# Altium PCB GDK.PcbDoc
Units mil, origin at the board's own origin, x right, y up, seen from the top; angles counter-clockwise.
Board outline 3145 x 2325 mil, 2 copper layers (Top Layer, Bottom Layer); 13 components, 5 nets, 28 pads, 1569 vias.
Unrouted connection lines stored in the file: 11.
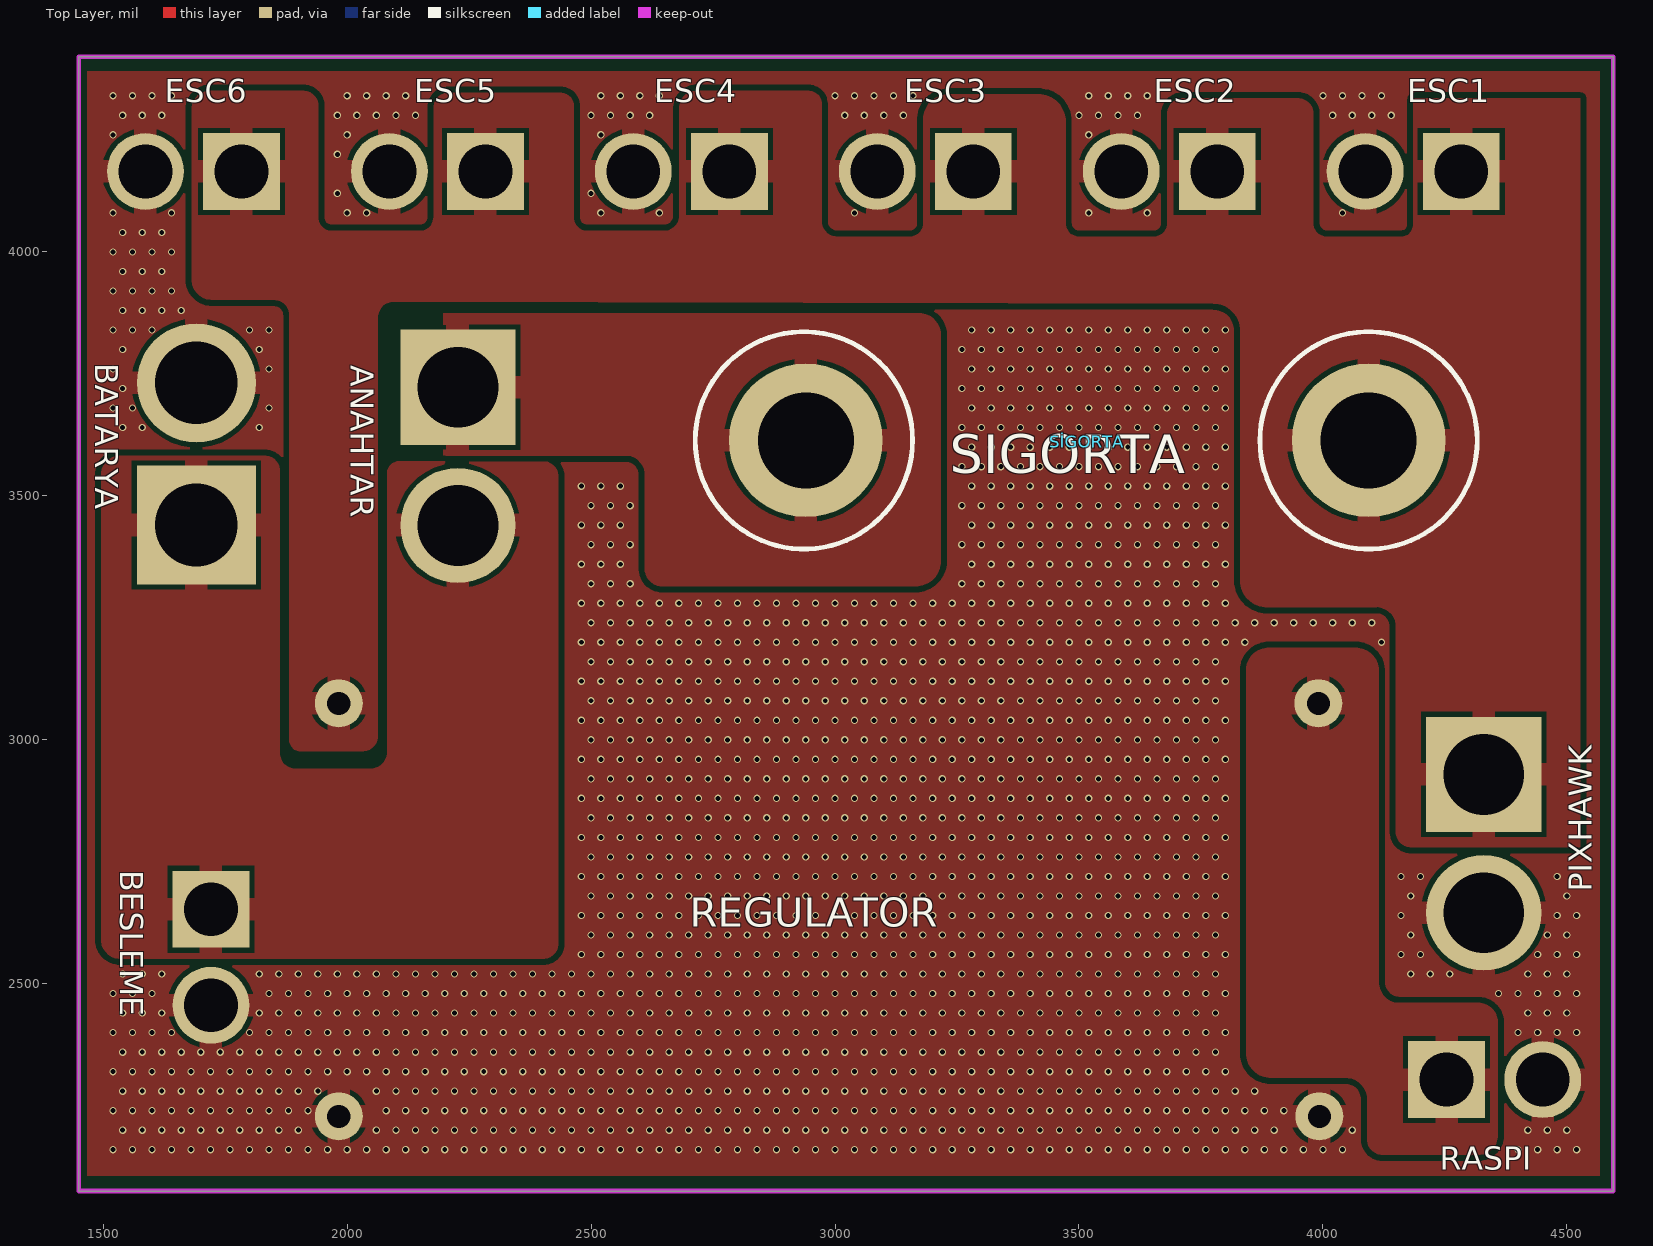
[diagram p0: Top Layer view]
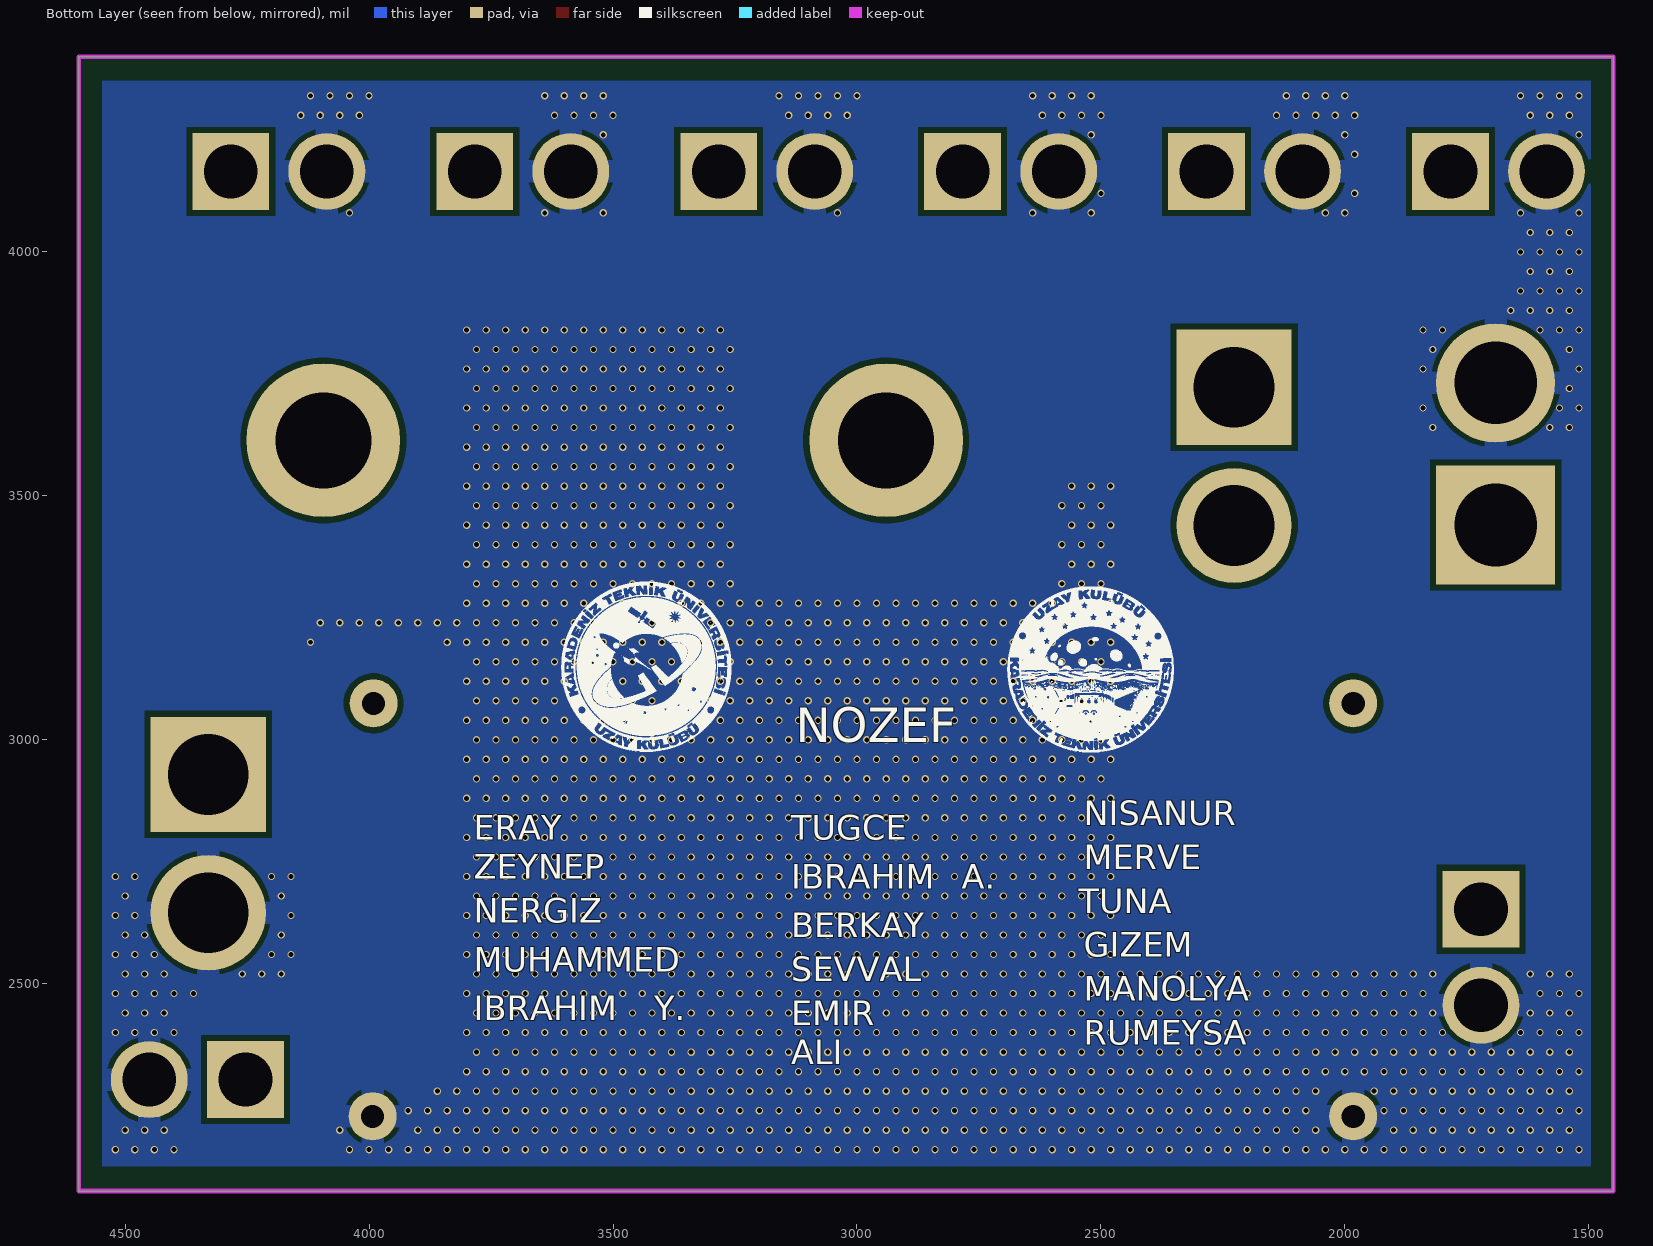
[diagram p1: Bottom Layer view, seen from below]
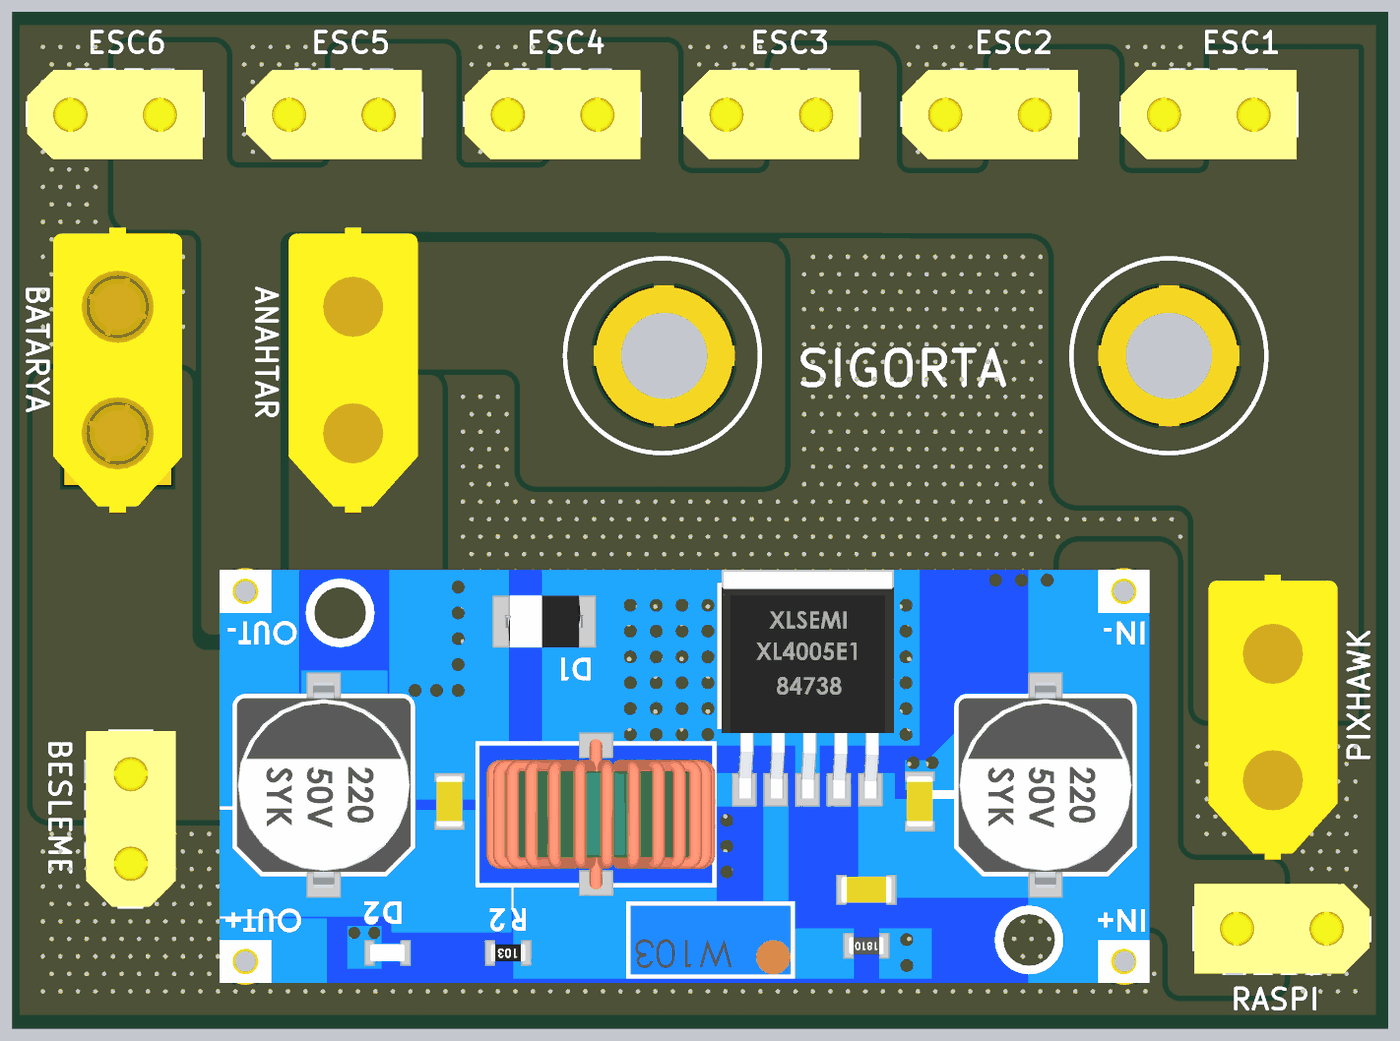
[diagram p2: 3D render of the assembled board from above, using the file's embedded part models]

## Layer stack, top to bottom
Top Solder: solder mask 0.4, Solder Resist, Dk 3.5
Top Layer: signal copper 1.4
Dielectric 1: dielectric 12.6, FR-4, Dk 4.8
Bottom Layer: signal copper 1.4
Bottom Solder: solder mask 0.4, Solder Resist, Dk 3.5

## Board outline
1450,2075 1450,4400 4595,4400 4595,2075

## Design rules (kind name [scope] priority, off if disabled: settings)
Clearance [All] p1: gap=12 ignorepadtopadclearanceinfootprint=FALSE
PolygonConnect [All] p1: connectstyle=Relief reliefconductorwidth=10 reliefentries=4 polygonreliefangle="90 Angle" airgapwidth=10
RoutingVias [All] p1: holewidth=28 width=50 viastyle="Through Hole" minholewidth=28 minwidth=50 maxholewidth=28 maxwidth=50
SolderMaskExpansion [All] p1: expansion=4 istentingtop=FALSE
Width [All] p1: maxlimit=10 minlimit=10 preferedwidth=10
30 further rules are at their usual default settings.

## Classes and differential pairs
component class Sheet1: BATARYA ESC1 ESC2 ESC3 ESC4 ESC5 ESC6 PIXHAWK RASPI REGULATOR SİGORTA

## Components (designator, comment, footprint, x,y, rotation, side; value= is the part's Value field where it differs from the comment)
ANAHTAR "ANAHTAR" "XT60 PİXHAWK" 2227.17,3581.1 r90 top
BATARYA "XT60 BAT" "XT60 BATARYA" 1690.94,3440.35 r270 top
BESLEME "XT30 ESC" "XT30 ESC" 1720.87,2652.76 r90 top
ESC1 "XT30 ESC" "XT30 ESC" 4283.43,4165 r0 top
ESC2 "XT30 ESC" "XT30 ESC" 3783.43,4165 r0 top
ESC3 "XT30 ESC" "XT30 ESC" 3283.43,4165 r0 top
ESC4 "XT30 ESC" "XT30 ESC" 2783.43,4165 r0 top
ESC5 "XT30 ESC" "XT30 ESC" 2283.43,4165 r0 top
ESC6 "XT30 ESC" "XT30 ESC" 1783.43,4165 r0 top
PIXHAWK "XT60-PİX" "XT60 PİXHAWK" 4329.53,2787.4 r90 top (schematic designator PİXHAWK)
RASPI "XT30" "XT30 ESC" 4253.54,2303.54 r180 top (schematic designator GÜÇ)
REGULATOR "REGÜLATÖR" REGÜLATÖR 2987.8,2651.57 r90 top (schematic designator REGÜLATÖR)
SİGORTA "SİGORTA" SİGORTA 4093.7,3613.78 r0 top

## Footprints (in the part's own frame and the unit in brackets; to place one, negate y for a bottom-side part, rotate by r counter-clockwise, add the part's x,y. Pads: shape width x height; smd on the part's side, far side on the other; paste and mask are expansions set on the pad)
REGÜLATÖR [mm]
  round 2.5 hole 1.2: 1(10.75,25.525) 2(-10.75,25.525) 3(10.75,-25.475) 4(-10.75,-25.525)
  body extent -12,-26.97 12.01,27.03, height 14.53
SİGORTA [mm]
  round 8 hole 5: 0(-29.3,0) 1(0,0)
  silkscreen extent -35.06,-5.65 5.66,5.65, body extent -40.06,-9.97 9.79,9.08, height 2.93
"XT30 ESC" [mm]
  round 4 hole 2.8: N(-5,0)
  rect 4x4 hole 2.8: P(0,0)
  body extent -7.7,-2.6 2.7,2.7, height 12.6
"XT60 BATARYA" [mm]
  rect 6.2x6.2 hole 4.3: 1(0,0)
  round 6.2 hole 4.3: 2(-7.4,0)
  body extent -11.85,-3.75 4.7,3.75, height 17
"XT60 PİXHAWK" [mm]
  rect 6x6 hole 4.2: 1(3.6,0)
  round 6 hole 4.2: 2(-3.6,0)
  body extent -8.28,-3.8 8.27,3.7, height 15.7

## Part data
ANAHTAR: library part XT60-PİX
BATARYA: library part "XT60 BATARYA"
PIXHAWK: library part XT60-PİXHAWK

## Via types
v1: diameter 15, hole 10, Top Layer to Bottom Layer, tented both sides, 1569 vias

## Nets (pads, with @x,y where several pads share a name; then routed paths per layer and width w, separated by ;. In a path a pad name is that pad's centre, name@x,y a point inside that pad or via, vN(x,y) a via of type N, cw(c..) or ccw(c..) an arc to the next point about the centre after c; other vN are vias at no path point)
+5: RASPI.P REGULATOR.3
A: ANAHTAR.2 BATARYA.1 BESLEME.P
GND: BATARYA.2 BESLEME.N ESC1.N ESC2.N ESC3.N ESC4.N ESC5.N ESC6.N PIXHAWK.2 RASPI.N REGULATOR.2 REGULATOR.4
  other v1: 1520,2160 1560,2160 1600,2160 1640,2160 1680,2160 1720,2160 1760,2160 1800,2160 1840,2160 1880,2160 1920,2160 1960,2160 2000,2160 2040,2160 2080,2160 2120,2160 2160,2160 2200,2160 2240,2160 2280,2160 2320,2160 2360,2160 2400,2160 2440,2160 2480,2160 2520,2160 2560,2160 2600,2160 2640,2160 2680,2160 2720,2160 2760,2160 2800,2160 2840,2160 2880,2160 2920,2160 2960,2160 3000,2160 3040,2160 3080,2160 3120,2160 3160,2160 3200,2160 3240,2160 3280,2160 3320,2160 3360,2160 3400,2160 3440,2160 3480,2160 3520,2160 3560,2160 3600,2160 3640,2160 3680,2160 3720,2160 3760,2160 3800,2160 3840,2160 3880,2160 3920,2160 3960,2160 4000,2160 4040,2160 4400,2160 4440,2160 4480,2160 4520,2160 1540,2200 1580,2200 1620,2200 1660,2200 1700,2200 1740,2200 1780,2200 1820,2200 1860,2200 1900,2200 2060,2200 2100,2200 2140,2200 2180,2200 2220,2200 2260,2200 2300,2200 2340,2200 2380,2200 2420,2200 2460,2200 2500,2200 2540,2200 2580,2200 2620,2200 2660,2200 2700,2200 2740,2200 2780,2200 2820,2200 2860,2200 2900,2200 2940,2200 2980,2200 3020,2200 3060,2200 3100,2200 3140,2200 3180,2200 3220,2200 3260,2200 3300,2200 3340,2200 3380,2200 3420,2200 3460,2200 3500,2200 3540,2200 3580,2200 3620,2200 3660,2200 3700,2200 3740,2200 3780,2200 3820,2200 3860,2200 3900,2200 4060,2200 4420,2200 4460,2200 4500,2200 1520,2240 1560,2240 1600,2240 1640,2240 1680,2240 1720,2240 1760,2240 1800,2240 1840,2240 1880,2240 1920,2240 2080,2240 2120,2240 2160,2240 2200,2240 2240,2240 2280,2240 2320,2240 2360,2240 2400,2240 2440,2240 2480,2240 2520,2240 2560,2240 2600,2240 2640,2240 2680,2240 2720,2240 2760,2240 2800,2240 2840,2240 2880,2240 2920,2240 2960,2240 3000,2240 3040,2240 3080,2240 3120,2240 3160,2240 3200,2240 3240,2240 3280,2240 3320,2240 3360,2240 3400,2240 3440,2240 3480,2240 3520,2240 3560,2240 3600,2240 3640,2240 3680,2240 3720,2240 3760,2240 3800,2240 3840,2240 3880,2240 3920,2240 1540,2280 1580,2280 1620,2280 1660,2280 1700,2280 1740,2280 1780,2280 1820,2280 1860,2280 1900,2280 1940,2280 2060,2280 2100,2280 2140,2280 2180,2280 2220,2280 2260,2280 2300,2280 2340,2280 2380,2280 2420,2280 2460,2280 2500,2280 2540,2280 2580,2280 2620,2280 2660,2280 2700,2280 2740,2280 2780,2280 2820,2280 2860,2280 2900,2280 2940,2280 2980,2280 3020,2280 3060,2280 3100,2280 3140,2280 3180,2280 3220,2280 3260,2280 3300,2280 3340,2280 3380,2280 3420,2280 3460,2280 3500,2280 3540,2280 3580,2280 3620,2280 3660,2280 3700,2280 3740,2280 3780,2280 3820,2280 3860,2280 1520,2320 1560,2320 1600,2320 1640,2320 1680,2320 1720,2320 1760,2320 1800,2320 1840,2320 1880,2320 1920,2320 1960,2320 2000,2320 2040,2320 2080,2320 2120,2320 2160,2320 2200,2320 2240,2320 2280,2320 2320,2320 2360,2320 2400,2320 2440,2320 2480,2320 2520,2320 2560,2320 2600,2320 2640,2320 2680,2320 2720,2320 2760,2320 2800,2320 2840,2320 2880,2320 2920,2320 2960,2320 3000,2320 3040,2320 3080,2320 3120,2320 3160,2320 3200,2320 3240,2320 3280,2320 3320,2320 3360,2320 3400,2320 3440,2320 3480,2320 3520,2320 3560,2320 3600,2320 3640,2320 3680,2320 3720,2320 3760,2320 3800,2320 1540,2360 1580,2360 1620,2360 1660,2360 1700,2360 1740,2360 1780,2360 1820,2360 1860,2360 1900,2360 1940,2360 1980,2360 2020,2360 2060,2360 2100,2360 2140,2360 2180,2360 2220,2360 2260,2360 2300,2360 2340,2360 2380,2360 2420,2360 2460,2360 2500,2360 2540,2360 2580,2360 2620,2360 2660,2360 2700,2360 2740,2360 2780,2360 2820,2360 2860,2360 2900,2360 2940,2360 2980,2360 3020,2360 3060,2360 3100,2360 3140,2360 3180,2360 3220,2360 3260,2360 3300,2360 3340,2360 3380,2360 3420,2360 3460,2360 3500,2360 3540,2360 3580,2360 3620,2360 3660,2360 3700,2360 3740,2360 3780,2360 1520,2400 1560,2400 1600,2400 1640,2400 1800,2400 1840,2400 1880,2400 1920,2400 1960,2400 2000,2400 2040,2400 2080,2400 2120,2400 2160,2400 2200,2400 2240,2400 2280,2400 2320,2400 2360,2400 2400,2400 2440,2400 2480,2400 2520,2400 2560,2400 2600,2400 2640,2400 2680,2400 2720,2400 2760,2400 2800,2400 2840,2400 2880,2400 2920,2400 2960,2400 3000,2400 3040,2400 3080,2400 3120,2400 3160,2400 3200,2400 3240,2400 3280,2400 3320,2400 3360,2400 3400,2400 3440,2400 3480,2400 3520,2400 3560,2400 3600,2400 3640,2400 3680,2400 3720,2400 3760,2400 3800,2400 4400,2400 4440,2400 4480,2400 4520,2400 1540,2440 1580,2440 1620,2440 1820,2440 1860,2440 1900,2440 1940,2440 1980,2440 2020,2440 2060,2440 2100,2440 2140,2440 2180,2440 2220,2440 2260,2440 2300,2440 2340,2440 2380,2440 2420,2440 2460,2440 2500,2440 2540,2440 2580,2440 2620,2440 2660,2440 2700,2440 2740,2440 2780,2440 2820,2440 2860,2440 2900,2440 2940,2440 2980,2440 3020,2440 3060,2440 3100,2440 3140,2440 3180,2440 3220,2440 3260,2440 3300,2440 3340,2440 3380,2440 3420,2440 3460,2440 3500,2440 3540,2440 3580,2440 3620,2440 3660,2440 3700,2440 3740,2440 3780,2440 4420,2440 4460,2440 4500,2440 1520,2480 1560,2480 1600,2480 1840,2480 1880,2480 1920,2480 1960,2480 2000,2480 2040,2480 2080,2480 2120,2480 2160,2480 2200,2480 2240,2480 2280,2480 2320,2480 2360,2480 2400,2480 2440,2480 2480,2480 2520,2480 2560,2480 2600,2480 2640,2480 2680,2480 2720,2480 2760,2480 2800,2480 2840,2480 2880,2480 2920,2480 2960,2480 3000,2480 3040,2480 3080,2480 3120,2480 3160,2480 3200,2480 3240,2480 3280,2480 3320,2480 3360,2480 3400,2480 3440,2480 3480,2480 3520,2480 3560,2480 3600,2480 3640,2480 3680,2480 3720,2480 3760,2480 3800,2480 4360,2480 4400,2480 4440,2480 4480,2480 4520,2480 1540,2520 1580,2520 1620,2520 1820,2520 1860,2520 1900,2520 1940,2520 1980,2520 2020,2520 2060,2520 2100,2520 2140,2520 2180,2520 2220,2520 2260,2520 2300,2520 2340,2520 2380,2520 2420,2520 2460,2520 2500,2520 2540,2520 2580,2520 2620,2520 2660,2520 2700,2520 2740,2520 2780,2520 2820,2520 2860,2520 2900,2520 2940,2520 2980,2520 3020,2520 3060,2520 3100,2520 3140,2520 3180,2520 3220,2520 3260,2520 3300,2520 3340,2520 3380,2520 3420,2520 3460,2520 3500,2520 3540,2520 3580,2520 3620,2520 3660,2520 3700,2520 3740,2520 3780,2520 4180,2520 4220,2520 4260,2520 4420,2520 4460,2520 4500,2520 2480,2560 2520,2560 2560,2560 2600,2560 2640,2560 2680,2560 2720,2560 2760,2560 2800,2560 2840,2560 2880,2560 2920,2560 2960,2560 3000,2560 3040,2560 3080,2560 3120,2560 3160,2560 3200,2560 3240,2560 3280,2560 3320,2560 3360,2560 3400,2560 3440,2560 3480,2560 3520,2560 3560,2560 3600,2560 3640,2560 3680,2560 3720,2560 3760,2560 3800,2560 4160,2560 4200,2560 4440,2560 4480,2560 4520,2560 2500,2600 2540,2600 2580,2600 2620,2600 2660,2600 2700,2600 2740,2600 2780,2600 2820,2600 2860,2600 2900,2600 2940,2600 2980,2600 3020,2600 3060,2600 3100,2600 3140,2600 3180,2600 3220,2600 3260,2600 3300,2600 3340,2600 3380,2600 3420,2600 3460,2600 3500,2600 3540,2600 3580,2600 3620,2600 3660,2600 3700,2600 3740,2600 3780,2600 4180,2600 4460,2600 4500,2600 2480,2640 2520,2640 2560,2640 2600,2640 2640,2640 2680,2640 2720,2640 2760,2640 2800,2640 2840,2640 2880,2640 2920,2640 2960,2640 3000,2640 3040,2640 3080,2640 3120,2640 3160,2640 3200,2640 3240,2640 3280,2640 3320,2640 3360,2640 3400,2640 3440,2640 3480,2640 3520,2640 3560,2640 3600,2640 3640,2640 3680,2640 3720,2640 3760,2640 3800,2640 4160,2640 4480,2640 4520,2640 2500,2680 2540,2680 2580,2680 2620,2680 2660,2680 2700,2680 2740,2680 2780,2680 2820,2680 2860,2680 2900,2680 2940,2680 2980,2680 3020,2680 3060,2680 3100,2680 3140,2680 3180,2680 3220,2680 3260,2680 3300,2680 3340,2680 3380,2680 3420,2680 3460,2680 3500,2680 3540,2680 3580,2680 3620,2680 3660,2680 3700,2680 3740,2680 3780,2680 4180,2680 4500,2680 2480,2720 2520,2720 2560,2720 2600,2720 2640,2720 2680,2720 2720,2720 2760,2720 2800,2720 2840,2720 2880,2720 2920,2720 2960,2720 3000,2720 3040,2720 3080,2720 3120,2720 3160,2720 3200,2720 3240,2720 3280,2720 3320,2720 3360,2720 3400,2720 3440,2720 3480,2720 3520,2720 3560,2720 3600,2720 3640,2720 3680,2720 3720,2720 3760,2720 3800,2720 4160,2720 4200,2720 4480,2720 4520,2720 2500,2760 2540,2760 2580,2760 2620,2760 2660,2760 2700,2760 2740,2760 2780,2760 2820,2760 2860,2760 2900,2760 2940,2760 2980,2760 3020,2760 3060,2760 3100,2760 3140,2760 3180,2760 3220,2760 3260,2760 3300,2760 3340,2760 3380,2760 3420,2760 3460,2760 3500,2760 3540,2760 3580,2760 3620,2760 3660,2760 3700,2760 3740,2760 3780,2760 2480,2800 2520,2800 2560,2800 2600,2800 2640,2800 2680,2800 2720,2800 2760,2800 2800,2800 2840,2800 2880,2800 2920,2800 2960,2800 3000,2800 3040,2800 3080,2800 3120,2800 3160,2800 3200,2800 3240,2800 3280,2800 3320,2800 3360,2800 3400,2800 3440,2800 3480,2800 3520,2800 3560,2800 3600,2800 3640,2800 3680,2800 3720,2800 3760,2800 3800,2800 2500,2840 2540,2840 2580,2840 2620,2840 2660,2840 2700,2840 2740,2840 2780,2840 2820,2840 2860,2840 2900,2840 2940,2840 2980,2840 3020,2840 3060,2840 3100,2840 3140,2840 3180,2840 3220,2840 3260,2840 3300,2840 3340,2840 3380,2840 3420,2840 3460,2840 3500,2840 3540,2840 3580,2840 3620,2840 3660,2840 3700,2840 3740,2840 3780,2840 2480,2880 2520,2880 2560,2880 2600,2880 2640,2880 2680,2880 2720,2880 2760,2880 2800,2880 2840,2880 2880,2880 2920,2880 2960,2880 3000,2880 3040,2880 3080,2880 3120,2880 3160,2880 3200,2880 3240,2880 3280,2880 3320,2880 3360,2880 3400,2880 3440,2880 3480,2880 3520,2880 3560,2880 3600,2880 3640,2880 3680,2880 3720,2880 3760,2880 3800,2880 2500,2920 2540,2920 2580,2920 2620,2920 2660,2920 2700,2920 2740,2920 2780,2920 2820,2920 2860,2920 2900,2920 2940,2920 2980,2920 3020,2920 3060,2920 3100,2920 3140,2920 3180,2920 3220,2920 3260,2920 3300,2920 3340,2920 3380,2920 3420,2920 3460,2920 3500,2920 3540,2920 3580,2920 3620,2920 3660,2920 3700,2920 3740,2920 3780,2920 2480,2960 2520,2960 2560,2960 2600,2960 2640,2960 2680,2960 2720,2960 2760,2960 2800,2960 2840,2960 2880,2960 2920,2960 2960,2960 3000,2960 3040,2960 3080,2960 3120,2960 3160,2960 3200,2960 3240,2960 3280,2960 3320,2960 3360,2960 3400,2960 3440,2960 3480,2960 3520,2960 3560,2960 3600,2960 3640,2960 3680,2960 3720,2960 3760,2960 3800,2960 2500,3000 2540,3000 2580,3000 2620,3000 2660,3000 2700,3000 2740,3000 2780,3000 2820,3000 2860,3000 2900,3000 2940,3000 2980,3000 3020,3000 3060,3000 3100,3000 3140,3000 3180,3000 3220,3000 3260,3000 3300,3000 3340,3000 3380,3000 3420,3000 3460,3000 3500,3000 3540,3000 3580,3000 3620,3000 3660,3000 3700,3000 3740,3000 3780,3000 2480,3040 2520,3040 2560,3040 2600,3040 2640,3040 2680,3040 2720,3040 2760,3040 2800,3040 2840,3040 2880,3040 2920,3040 2960,3040 3000,3040 3040,3040 3080,3040 3120,3040 3160,3040 3200,3040 3240,3040 3280,3040 3320,3040 3360,3040 3400,3040 3440,3040 3480,3040 3520,3040 3560,3040 3600,3040 3640,3040 3680,3040 3720,3040 3760,3040 3800,3040 2500,3080 2540,3080 2580,3080 2620,3080 2660,3080 2700,3080 2740,3080 2780,3080 2820,3080 2860,3080 2900,3080 2940,3080 2980,3080 3020,3080 3060,3080 3100,3080 3140,3080 3180,3080 3220,3080 3260,3080 3300,3080 3340,3080 3380,3080 3420,3080 3460,3080 3500,3080 3540,3080 3580,3080 3620,3080 3660,3080 3700,3080 3740,3080 3780,3080 2480,3120 2520,3120 2560,3120 2600,3120 2640,3120 2680,3120 2720,3120 2760,3120 2800,3120 2840,3120 2880,3120 2920,3120 2960,3120 3000,3120 3040,3120 3080,3120 3120,3120 3160,3120 3200,3120 3240,3120 3280,3120 3320,3120 3360,3120 3400,3120 3440,3120 3480,3120 3520,3120 3560,3120 3600,3120 3640,3120 3680,3120 3720,3120 3760,3120 3800,3120 2500,3160 2540,3160 2580,3160 2620,3160 2660,3160 2700,3160 2740,3160 2780,3160 2820,3160 2860,3160 2900,3160 2940,3160 2980,3160 3020,3160 3060,3160 3100,3160 3140,3160 3180,3160 3220,3160 3260,3160 3300,3160 3340,3160 3380,3160 3420,3160 3460,3160 3500,3160 3540,3160 3580,3160 3620,3160 3660,3160 3700,3160 3740,3160 3780,3160 2480,3200 2520,3200 2560,3200 2600,3200 2640,3200 2680,3200 2720,3200 2760,3200 2800,3200 2840,3200 2880,3200 2920,3200 2960,3200 3000,3200 3040,3200 3080,3200 3120,3200 3160,3200 3200,3200 3240,3200 3280,3200 3320,3200 3360,3200 3400,3200 3440,3200 3480,3200 3520,3200 3560,3200 3600,3200 3640,3200 3680,3200 3720,3200 3760,3200 3800,3200 3840,3200 4120,3200 2500,3240 2540,3240 2580,3240 2620,3240 2660,3240 2700,3240 2740,3240 2780,3240 2820,3240 2860,3240 2900,3240 2940,3240 2980,3240 3020,3240 3060,3240 3100,3240 3140,3240 3180,3240 3220,3240 3260,3240 3300,3240 3340,3240 3380,3240 3420,3240 3460,3240 3500,3240 3540,3240 3580,3240 3620,3240 3660,3240 3700,3240 3740,3240 3780,3240 3820,3240 3860,3240 3900,3240 3940,3240 3980,3240 4020,3240 4060,3240 4100,3240 2480,3280 2520,3280 2560,3280 2600,3280 2640,3280 2680,3280 2720,3280 2760,3280 2800,3280 2840,3280 2880,3280 2920,3280 2960,3280 3000,3280 3040,3280 3080,3280 3120,3280 3160,3280 3200,3280 3240,3280 3280,3280 3320,3280 3360,3280 3400,3280 3440,3280 3480,3280 3520,3280 3560,3280 3600,3280 3640,3280 3680,3280 3720,3280 3760,3280 3800,3280 2500,3320 2540,3320 2580,3320 3260,3320 3300,3320 3340,3320 3380,3320 3420,3320 3460,3320 3500,3320 3540,3320 3580,3320 3620,3320 3660,3320 3700,3320 3740,3320 3780,3320 2480,3360 2520,3360 2560,3360 3280,3360 3320,3360 3360,3360 3400,3360 3440,3360 3480,3360 3520,3360 3560,3360 3600,3360 3640,3360 3680,3360 3720,3360 3760,3360 3800,3360 2500,3400 2540,3400 2580,3400 3260,3400 3300,3400 3340,3400 3380,3400 3420,3400 3460,3400 3500,3400 3540,3400 3580,3400 3620,3400 3660,3400 3700,3400 3740,3400 3780,3400 2480,3440 2520,3440 2560,3440 3280,3440 3320,3440 3360,3440 3400,3440 3440,3440 3480,3440 3520,3440 3560,3440 3600,3440 3640,3440 3680,3440 3720,3440 3760,3440 3800,3440 2500,3480 2540,3480 2580,3480 3260,3480 3300,3480 3340,3480 3380,3480 3420,3480 3460,3480 3500,3480 3540,3480 3580,3480 3620,3480 3660,3480 3700,3480 3740,3480 3780,3480 2480,3520 2520,3520 2560,3520 3280,3520 3320,3520 3360,3520 3400,3520 3440,3520 3480,3520 3520,3520 3560,3520 3600,3520 3640,3520 3680,3520 3720,3520 3760,3520 3800,3520 3260,3560 3300,3560 3340,3560 3380,3560 3420,3560 3460,3560 3500,3560 3540,3560 3580,3560 3620,3560 3660,3560 3700,3560 3740,3560 3780,3560 3280,3600 3320,3600 3360,3600 3400,3600 3440,3600 3480,3600 3520,3600 3560,3600 3600,3600 3640,3600 3680,3600 3720,3600 3760,3600 3800,3600 1540,3640 1580,3640 1820,3640 3260,3640 3300,3640 3340,3640 3380,3640 3420,3640 3460,3640 3500,3640 3540,3640 3580,3640 3620,3640 3660,3640 3700,3640 3740,3640 3780,3640 1520,3680 1560,3680 1840,3680 3280,3680 3320,3680 3360,3680 3400,3680 3440,3680 3480,3680 3520,3680 3560,3680 3600,3680 3640,3680 3680,3680 3720,3680 3760,3680 3800,3680 1540,3720 3260,3720 3300,3720 3340,3720 3380,3720 3420,3720 3460,3720 3500,3720 3540,3720 3580,3720 3620,3720 3660,3720 3700,3720 3740,3720 3780,3720 1520,3760 1840,3760 3280,3760 3320,3760 3360,3760 3400,3760 3440,3760 3480,3760 3520,3760 3560,3760 3600,3760 3640,3760 3680,3760 3720,3760 3760,3760 3800,3760 1540,3800 1820,3800 3260,3800 3300,3800 3340,3800 3380,3800 3420,3800 3460,3800 3500,3800 3540,3800 3580,3800 3620,3800 3660,3800 3700,3800 3740,3800 3780,3800 1520,3840 1560,3840 1600,3840 1800,3840 1840,3840 3280,3840 3320,3840 3360,3840 3400,3840 3440,3840 3480,3840 3520,3840 3560,3840 3600,3840 3640,3840 3680,3840 3720,3840 3760,3840 3800,3840 1540,3880 1580,3880 1620,3880 1660,3880 1520,3920 1560,3920 1600,3920 1640,3920 1540,3960 1580,3960 1620,3960 1520,4000 1560,4000 1600,4000 1640,4000 1540,4040 1580,4040 1620,4040 1520,4080 1640,4080 2000,4080 2040,4080 2520,4080 2640,4080 3040,4080 3520,4080 3640,4080 4040,4080 1980,4120 2500,4120 1980,4200 1520,4240 2000,4240 2520,4240 3520,4240 1540,4280 1580,4280 1620,4280 1980,4280 2020,4280 2060,4280 2100,4280 2140,4280 2500,4280 2540,4280 2580,4280 2620,4280 3020,4280 3060,4280 3100,4280 3140,4280 3500,4280 3540,4280 3580,4280 3620,4280 4020,4280 4060,4280 4100,4280 4140,4280 1520,4320 1560,4320 1600,4320 1640,4320 2000,4320 2040,4320 2080,4320 2120,4320 2520,4320 2560,4320 2600,4320 2640,4320 3000,4320 3040,4320 3080,4320 3120,4320 3160,4320 3520,4320 3560,4320 3600,4320 3640,4320 4000,4320 4040,4320 4080,4320 4120,4320
NetANAHTAR_1: ANAHTAR.1 SİGORTA.0
VCC: ESC1.P ESC2.P ESC3.P ESC4.P ESC5.P ESC6.P PIXHAWK.1 REGULATOR.1 SİGORTA.1

## Polygon pours and split planes (outlines as drawn)
+5 on Top Layer "+5_L01_P002" (solid, pour order 2): 3889.76,3188.97 4066.93,3188.98 cw(c4066.93,3141.73) 4114.17,3141.73 4114.17,2503.94 ccw(c4157.48,2503.94) 4157.48,2460.63 4318.9,2460.63 cw(c4318.9,2421.26) 4358.27,2421.26 4358.27,2188.98 cw(c4318.9,2188.98) 4318.9,2149.61 4122.05,2149.61 cw(c4122.05,2181.1) 4090.55,2181.1 4090.55,2263.78 ccw(c4047.24,2263.78) 4047.24,2307.09 3893.7,2307.09 cw(c3893.7,2358.27) 3842.52,2358.27 3842.52,3141.73 cw(c3889.76,3141.73)
NetANAHTAR_1 on Top Layer "NETANAHTAR_1_L01_P001" (solid, pour order 1): 2196.85,3582.68 2570.87,3582.68 cw(c2570.87,3543.31) 2610.24,3543.31 2610.24,3350.39 ccw(c2645.67,3350.39) 2645.67,3314.96 3165.35,3314.96 ccw(c3165.35,3366.14) 3216.54,3366.14 3216.54,3830.71 ccw(c3173.23,3830.71) 3173.23,3874.02 2196.85,3874.02
VCC on Top Layer "VCC_L01_P000" (solid, pour order 0): 2031.49,2976.38 1905.51,2976.38 cw(c1905.51,3000) 1881.89,3000 1881.89,3870.08 ccw(c1850.4,3870.08) 1850.39,3901.57 1724.41,3901.57 cw(c1724.41,3944.88) 1681.1,3944.88 1681.1,4291.34 cw(c1720.47,4291.34) 1720.47,4330.71 1909.45,4330.71 cw(c1909.46,4299.23) 1940.94,4299.21 1940.94,4070.87 ccw(c1968.5,4070.86) 1968.5,4043.31 2149.61,4043.31 ccw(c2149.61,4070.86) 2177.17,4070.87 2177.17,4295.28 cw(c2208.66,4295.28) 2208.66,4326.77 2437.01,4326.77 cw(c2437.02,4299.23) 2464.57,4299.21 2464.57,4070.87 ccw(c2492.12,4070.86) 2492.13,4043.31 2649.61,4043.31 ccw(c2649.61,4074.8) 2681.1,4074.8 2681.1,4295.28 cw(c2716.53,4295.28) 2716.54,4330.71 2944.88,4330.71 cw(c2944.88,4303.15) 2972.44,4303.15 2972.44,4062.99 ccw(c3003.93,4062.99) 3003.93,4031.5 3153.54,4031.5 ccw(c3153.54,4059.05) 3181.1,4059.06 3181.1,4271.65 cw(c3232.28,4271.65) 3232.28,4322.83 3417.33,4322.83 cw(c3417.35,4267.74) 3472.44,4267.72 3472.44,4059.06 ccw(c3499.99,4059.05) 3500,4031.5 3653.54,4031.5 ccw(c3653.54,4059.05) 3681.1,4059.06 3681.1,4283.46 cw(c3712.6,4283.46) 3712.6,4314.96 3948.82,4314.96 cw(c3948.83,4283.48) 3980.31,4283.46 3980.31,4059.06 ccw(c4007.87,4059.05) 4007.87,4031.5 4161.42,4031.5 ccw(c4161.42,4055.12) 4185.04,4055.12 4185.04,4311.02 cw(c4188.98,4311.02) 4188.98,4314.96 4527.56,4314.96 4527.56,2779.53 4181.1,2779.53 cw(c4181.1,2811.02) 4149.61,2811.02 4149.61,3232.28 ccw(c4110.25,3232.29) 4110.24,3271.65 3885.83,3271.65 cw(c3885.82,3326.77) 3830.71,3326.77 3830.71,3838.55 ccw(c3775.38,3838.56) 3775.5,3893.88 2094.44,3897.54 ccw(c2094.36,3866.17) 2062.99,3866.17 2062.99,3007.87 cw(c2031.5,3007.87)
GND on Top Layer "GND_L01_P007" (solid, remove dead copper, pour order 7): 1460.63,4370.08 4566.93,4370.08 4566.93,2106.3 1460.63,2106.3
A on Top Layer "A_L01_P003" (solid, pour order 3): 1496.06,3543.31 1496.06,2590.55 ccw(c1535.43,2590.55) 1535.43,2551.18 2401.57,2551.18 ccw(c2401.57,2582.68) 2433.07,2582.68 2433.07,3539.37 ccw(c2401.58,3539.37) 2401.57,3570.87 2106.3,3570.87 ccw(c2106.3,3547.24) 2082.68,3547.24 2082.68,2976.38 cw(c2047.25,2976.38) 2047.24,2940.94 1893.7,2940.94 cw(c1893.7,2972.44) 1862.2,2972.44 1862.2,3551.18 ccw(c1830.71,3551.18) 1830.71,3582.68 1535.43,3582.68 ccw(c1535.43,3543.31)
GND on Bottom Layer "GND_L02_P004" (solid, pour order 4): 1496.06,4350.39 4547.24,4350.39 4547.24,2125.98 1496.06,2125.98

## Keep-outs
Keep-Out Layer:
  the board outline again, w10

## Silkscreen, mask and mechanical layers (free items; w line width, h text height)
Bottom Overlay:
  drawing of 253 lines, arcs and shapes, not listed
  text "NOZEF" at 3125,2995 h70
  text "NISANUR" at 2535,2825 h50
  text "TUGCE" at 3135,2795 h50
  text "ERAY" at 3785,2795 h50
  text "MERVE" at 2535,2735 h50
  text "ZEYNEP" at 3785,2715 h50
  text "A." at 2785,2695 h50
  text "IBRAHIM" at 3135,2695 h50
  text "TUNA" at 2545,2645 h50
  text "NERGIZ" at 3785,2625 h50
  text "BERKAY" at 3135,2595 h50
  text "GIZEM" at 2535,2555 h50
  text "MUHAMMED" at 3785,2525 h50
  text "SEVVAL" at 3135,2505 h50
  text "MANOLYA" at 2535,2465 h50
  text "Y." at 3415,2425 h50
  text "IBRAHIM" at 3785,2425 h50
  text "EMIR" at 3135,2415 h50
  text "RUMEYSA" at 2535,2375 h50
  text "ALI" at 3135,2335 h50

## Text inside footprints (layer, text, board x,y; h text height)
SİGORTA: Top Overlay "SIGORTA" at 3235.43,3546.85 h78.74